# EAGLE board Lab 6 CTD new (EAGLE 9.6.2)
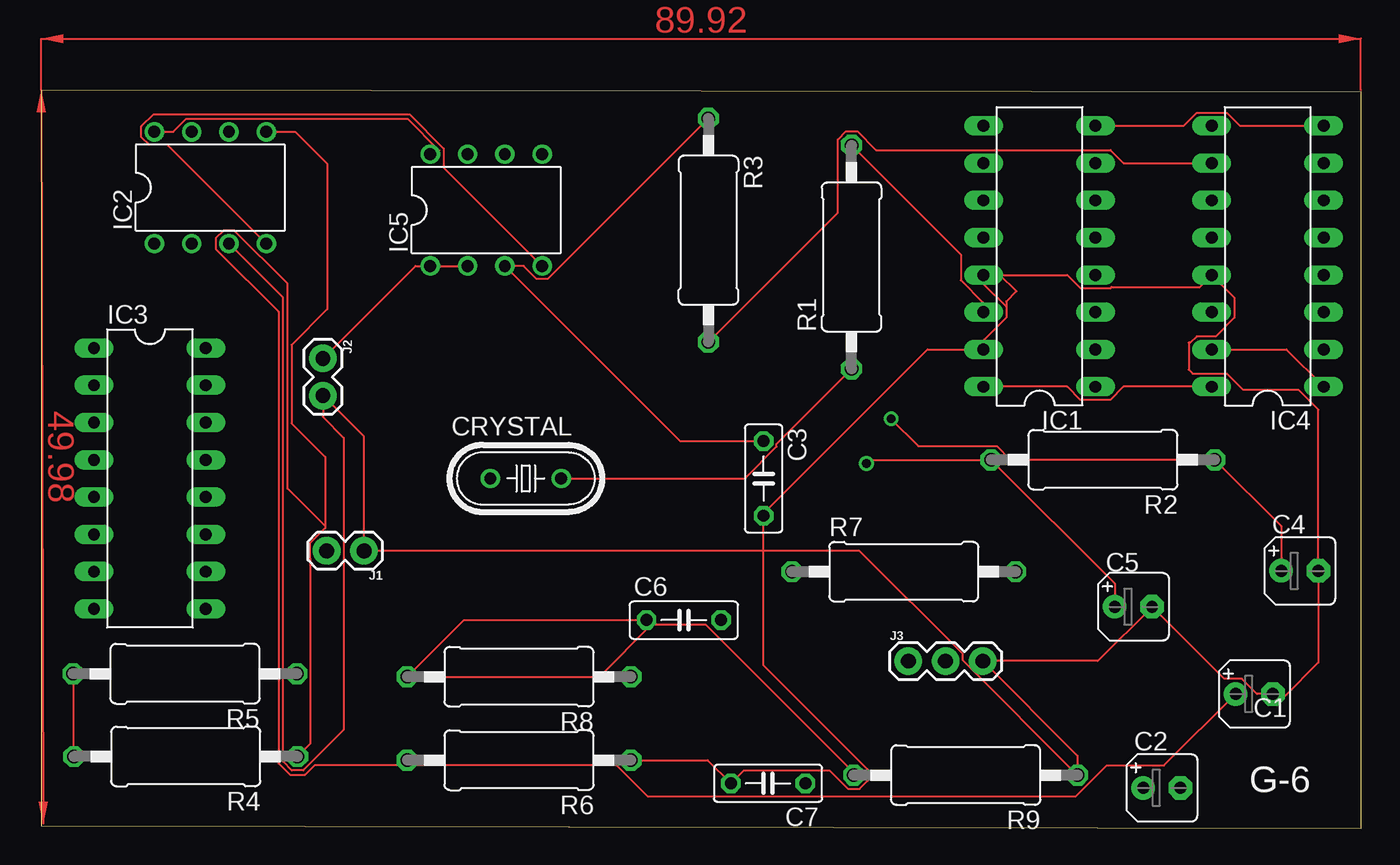
[diagram p0: board, top side]
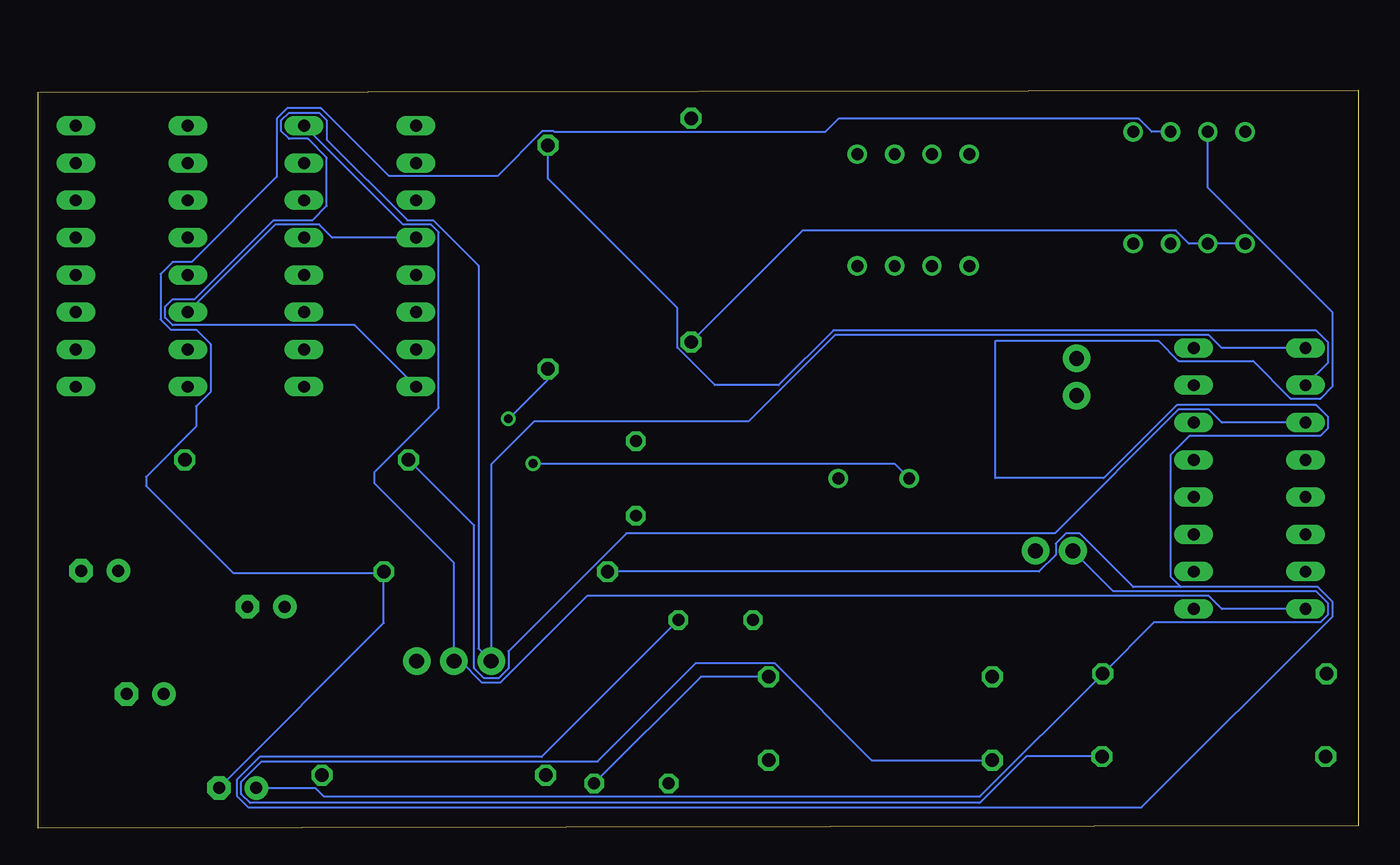
[diagram p1: board, bottom side, seen from below]

Size 89.94 x 50.28 mm. Coordinates in mm from the lower left corner, seen from the top.
Outline: 0,0.15 89.94,0 89.94,50.13 0,50.28 0,0.15
Copper layers (1*16): Top 0.035mm / dielectric 1.5mm / Bottom 0.035mm
Design rules "default *": minimum track width 6mil, minimum drill 0.6mm, track to track 6mil, track to pad 6mil, pad to pad 6mil, via to via 6mil, smd to smd 6mil, copper to edge 40mil, drill to drill 6mil, minimum pad ring 10mil, minimum via ring 8mil, stop-mask expansion 4mil, vias tented up to drill 0mil, thermal gap 10mil

## Footprints (pad centres in the part's own frame; a part is rotated, then mirrored left to right if it is on the bottom)
B45181A = drill 0.813 pad 1.6: + -1.27,0 | drill 0.813 pad 1.6 octagon: - 1.27,0
C050-025X075 = drill 0.813 octagon: 1 -2.54,0; 2 2.54,0
HC49U-V = drill 0.813: 1 -2.413,0; 2 2.413,0
DIL16 = drill 0.813 long: 1 -8.89,-3.81; 2 -6.35,-3.81; 3 -3.81,-3.81; 4 -1.27,-3.81; 5 1.27,-3.81; 6 3.81,-3.81; 7 6.35,-3.81; 8 8.89,-3.81; 9 8.89,3.81; 10 6.35,3.81; 11 3.81,3.81; 12 1.27,3.81; 13 -1.27,3.81; 14 -3.81,3.81; 15 -6.35,3.81; 16 -8.89,3.81
DIL08 = drill 0.813 pad 1.27: 1 -3.81,-3.81; 2 -1.27,-3.81; 3 1.27,-3.81; 4 3.81,-3.81; 5 3.81,3.81; 6 1.27,3.81; 7 -1.27,3.81; 8 -3.81,3.81
1X02 = drill 1.016 pad 1.88: 1 0,0; 2 2.54,0
1X03 = drill 1.016 pad 1.88: 1 0,0; 2 2.54,0; 3 5.08,0
0411/15 = drill 0.914 octagon: 1 -7.62,0; 2 7.62,0

## Placement (x,y rotation side)
C1  [B45181A]  82.65,9.14 0 top
C2  [B45181A]  76.35,2.74 0 top
C3  [C050-025X075]  49.23,23.83 270 top
C4  [B45181A]  85.75,17.53 0 top
C5  [B45181A]  74.42,15.09 0 top
C6  [C050-025X075]  43.79,14.17 0 top
C7  [C050-025X075]  49.53,3.05 180 top
CRYSTAL  2Mhz  [HC49U-V]  33.02,23.83 0 top
IC1  4017N  [DIL16]  68.02,38.96 90 top
IC2  TL072P  [DIL08]  11.53,43.64 0 top
IC3  4049N  [DIL16]  7.42,23.83 270 top
IC4  4017N  [DIL16]  83.57,38.96 90 top
IC5  TL072P  [DIL08]  30.33,42.11 0 top
J1  [1X02]  22,18.9 180 top
J2  [1X02]  19.2,32 270 top
J3  455-1750-1-ND  [1X03]  59.08,11.38 0 top
R1  [0411/15]  55.22,38.91 90 top
R2  [0411/15]  72.34,25.1 180 top
R3  [0411/15]  45.47,40.74 270 top
R4  [0411/15]  9.86,4.88 180 top
R5  [0411/15]  9.8,10.52 180 top
R6  [0411/15]  32.56,4.62 180 top
R7  [0411/15]  58.78,17.48 0 top
R8  [0411/15]  32.56,10.31 180 top
R9  [0411/15]  62.99,3.61 180 top

## Library data of the parts
C1-C7 = rcl; SPICEPREFIX: C
CRYSTAL = crystal; OC_FARNELL: 1666969; OC_NEWARK: unknown
IC1 IC3 IC4 = 40xx
IC2 IC5 = linear
J1 J2 = SparkFun-Connectors
J3 = SparkFun-Connectors; PROD_ID: XXX-00000
R1-R9 = resistor

## Nets
GND: C1.- C3.2 C4.- C5.- C7.2 IC1.13 IC1.15 IC2.3 IC4.13 J1.1 J2.2 J3.3 R6.1 R9.1
N$1: IC1.14 IC3.2 R1.2
N$2: IC1.12 IC4.14
N$3: IC4.1 IC4.15
N$4: C4.+ CRYSTAL.2 R1.1 R2.1
N$5: C5.+ CRYSTAL.1 IC3.3 R2.2
N$6: IC2.1 IC2.2 IC4.10 R3.2
N$7: C3.1 IC5.3 R3.1
N$8: IC5.1 IC5.2 J2.1
N$10: C6.2 IC2.7 R7.1
N$11: R4.2 R5.2
N$12: C2.- IC2.6 R7.2
N$13: C6.1 R8.2 R9.2
N$14: C2.+ J1.2 R5.1
N$16: C7.1 R8.1
N$17: C1.+ IC2.5 R4.1 R6.2
V+: IC2.8 IC5.8
V-: IC2.4 IC5.4
VDD: IC1.16 IC3.1 IC4.16 J3.1
VSS: IC1.8 IC3.8 IC4.8 J3.2

## Tracks (layer width: path | path; a pad name or v marks a point on that pad's centre or on a via)
GND
  Top 0.152: R6.1 45.41,4.62 C7.2 47.88,3.94 53.71,3.94 54.98,2.67 55.76,2.67 56.31,3.22 56.31,4 49.23,11.08 C3.2 49.23,21.44 60.4,32.61 IC1.15 64.21,33.24 65.76,34.78 65.76,35.52 | IC2.3 16.48,36.14 16.48,4.54 17.09,3.94 17.86,3.94 20.62,6.7 20.62,26.59 19.2,28.01 J2.2 22,26.67 J1.1 55.75,18.9 62.79,11.86 62.79,11.43 R9.1 70.61,4.93 J3.3 71.98,11.38 C5.- 80.61,10.17 81.81,10.17 82.84,9.14 C1.- 84.12,9.14 84.28,8.99 84.73,8.99 87.02,11.28 C4.- 87.02,28.51 85.66,29.87 81.88,29.87 80.78,30.96 78.46,30.96 78.18,31.24 78.18,33.07 78.3,33.07 78.73,33.5 80.02,33.5 81.31,34.78 81.31,36.14 IC4.13 78.94,36.88 72.94,36.88 72.86,36.8 70.8,36.8 69.91,37.69 65.33,37.69 66.45,36.58 65.76,35.89 65.76,35.52 | IC1.13 64.21,37.07 65.76,35.52
N$1
  Top 0.152: R1.2 62.66,39.09 62.66,37.33 64.21,35.78 IC1.14
  Bottom 0.152: IC3.2 2.06,31.72 2.06,33.08 2.88,33.91 35.77,33.91 39.51,30.18 43.85,30.18 46.41,32.73 46.41,35.43 55.22,44.25 R1.2
N$2
  Bottom 0.152: IC1.12 69.91,40.23 70.8,41.12 73.79,41.12 IC4.14
N$3
  Top 0.152: IC4.15 84.84,32.61 IC4.1
N$4  (via drill 0.6)
  Top 0.152: C4.+ 84.48,20.57 R2.1 66.05,25.1 65.11,26.04 59.77,26.04 v57.91,27.89 | R1.1 50.11,26.19 50.11,26 47.94,23.82 CRYSTAL.2
  Bottom 0.152: v57.91,27.89 55.22,30.58 R1.1
N$5  (via drill 0.6)
  Top 0.152: C5.+ 73.15,16.66 R2.2 56.49,25.1 v56.24,24.84
  Bottom 0.152: IC3.3 9.31,27.64 10.2,28.52 12.26,28.52 20.69,20.09 49.87,20.09 57.91,12.05 57.91,10.89 58.6,10.21 59.56,10.21 60.25,10.89 60.25,20.63 R2.2 | CRYSTAL.1 31.62,24.84 v56.24,24.84
N$6
  Top 0.152: IC4.10 73.75,45.31 72.86,46.2 56.88,46.2 55.61,47.47 54.83,47.47 54.28,46.92 54.28,41.94 R3.2
  Bottom 0.152: IC2.1 IC2.2 11.54,39.83 12.43,40.72 37.87,40.72 R3.2
N$7
  Top 0.152: R3.1 34.52,37.41 33.77,37.41 32.88,38.3 IC5.3 43.54,26.36 C3.1
N$8
  Top 0.152: J2.1 25.5,38.3 IC5.1 IC5.2
N$10
  Bottom 0.152: 12.1,16.43 15.34,16.43 18.97,20.07 19.94,20.07 20.62,19.38 20.62,18.62 21.77,17.47 R7.1 | IC2.7 10.26,43.62 1.75,35.11 1.75,30.11 2.58,29.29 4.63,29.29 7.17,31.83 12.26,31.83 13.6,33.17 24.74,33.17 24.74,23.85 17.36,23.85 12.38,28.83 2.88,28.83 2.06,28 2.06,27.27 2.58,26.75 11.49,26.75 12.78,25.46 12.78,17.11 12.1,16.43 | C6.2 55.65,4.85 74.86,4.85 76.42,3.3 76.42,2.19 75.64,1.41 14.78,1.41 1.75,14.44 1.75,15.43 2.76,16.43 12.1,16.43
N$11
  Top 0.152: R5.2 2.18,4.93 R4.2
N$12
  Bottom 0.152: C2.- 66.4,13.97 66.4,17.37 | 66.4,17.37 R7.2 | IC2.6 14.08,47.45 14.97,48.34 35.43,48.34 36.35,47.42 54.78,47.42 54.83,47.47 55.61,47.47 58.66,44.42 66.05,44.42 70.68,49.05 72.99,49.05 73.69,48.35 73.69,44.39 79.49,38.58 80.78,38.58 81.61,37.76 81.61,34.66 80.91,33.96 79.19,33.96 78.21,32.98 78.21,29.71 79.19,28.73 79.19,27.35 82.6,23.93 82.6,23.32 76.66,17.37 66.4,17.37
N$13
  Top 0.152: R9.2 55.63,3.35 55.78,3.35 45.26,13.87 41.6,13.87 38.05,10.31 R8.2 28.8,14.17 C6.1
N$14
  Bottom 0.152: C2.+ 71.08,2.74 70.49,2.16 25.78,2.16 R5.1 13.89,14.05 2.58,14.05 2.06,14.57 2.06,15.3 2.88,16.13 16.69,16.13 J1.2
N$16
  Bottom 0.152: R8.1 44.81,10.31 C7.1
N$17
  Top 0.152: IC2.5 17.32,47.45 19.51,45.26 19.51,35.36 17.07,32.92 17.07,27.58 19.36,25.3 19.36,20.57 | 19.36,20.57 19.36,20.45 18.29,19.38 18.29,18.41 18.36,18.34 18.36,5.77 R4.1 | 19.36,20.57 16.79,23.14 16.79,37.1 13.17,40.72 12.43,40.72 11.91,40.19 11.91,39.46 16.18,35.19 16.18,4.41 16.96,3.63 17.99,3.63 18.63,4.27 39.21,4.27 41.32,2.16 70.49,2.16 72.6,4.27 76.5,4.27 C1.+
  Bottom 0.152: R4.1 22.63,4.88 25.79,1.71 75.51,1.71 76.11,2.32 76.11,3.17 74.73,4.55 51.83,4.55 45.12,11.25 39.79,11.25 33.16,4.62 R6.2
V+
  Top 0.152: IC2.8 9,47.45 9.89,48.34 24.97,48.34 27.13,46.18 26.87,45.92 IC5.8
V-
  Top 0.152: IC2.4 8.61,46.56 7.35,46.56 6.83,47.08 6.83,47.81 7.66,48.64 25.09,48.64 27.43,46.3 27.43,45.01 IC5.4
VDD
  Top 0.152: IC4.16 73.75,30.07 72.86,29.18 70.8,29.18 69.91,30.07 IC1.16
  Bottom 0.152: IC3.1 9.31,32.72 10.2,33.6 35.65,33.6 41.54,27.71 56.16,27.71 59.08,24.79 J3.1 59.94,12.24 59.94,38.31 63.06,41.43 64.78,41.43 70.28,46.93 70.28,48.22 70.8,48.74 72.86,48.74 73.38,48.22 73.38,47.48 72.86,46.97 71.56,46.97 70.28,45.68 70.28,42.41 71.26,41.43 73.91,41.43 79.3,36.04 80.78,36.04 81.31,35.52 81.31,34.78 80.78,34.27 68.4,34.27 IC1.16
VSS
  Top 0.152: IC1.8 77.84,47.85 78.73,48.74 80.78,48.74 81.67,47.85 IC4.8
  Bottom 0.152: IC3.8 9.31,14.93 10.2,15.82 52.55,15.82 58.47,9.91 59.69,9.91 61.16,11.38 J3.2 61.62,18.08 67.03,23.49 67.03,24.26 62.66,28.63 62.66,40.6 63.18,41.12 65.1,41.12 IC1.8
(copper drawn outside any net)
  shapes: Top area x2

## Text on the board
tPlace: G-6